# Altium PCB DVT-Notch-Filter.PcbDoc
Units mm, origin at the board's own origin, x right, y up, seen from the top; angles counter-clockwise.
Board outline 60 x 45 mm, 2 copper layers (Top Layer, Bottom Layer); 26 components, 11 nets, 60 pads, 2 vias.
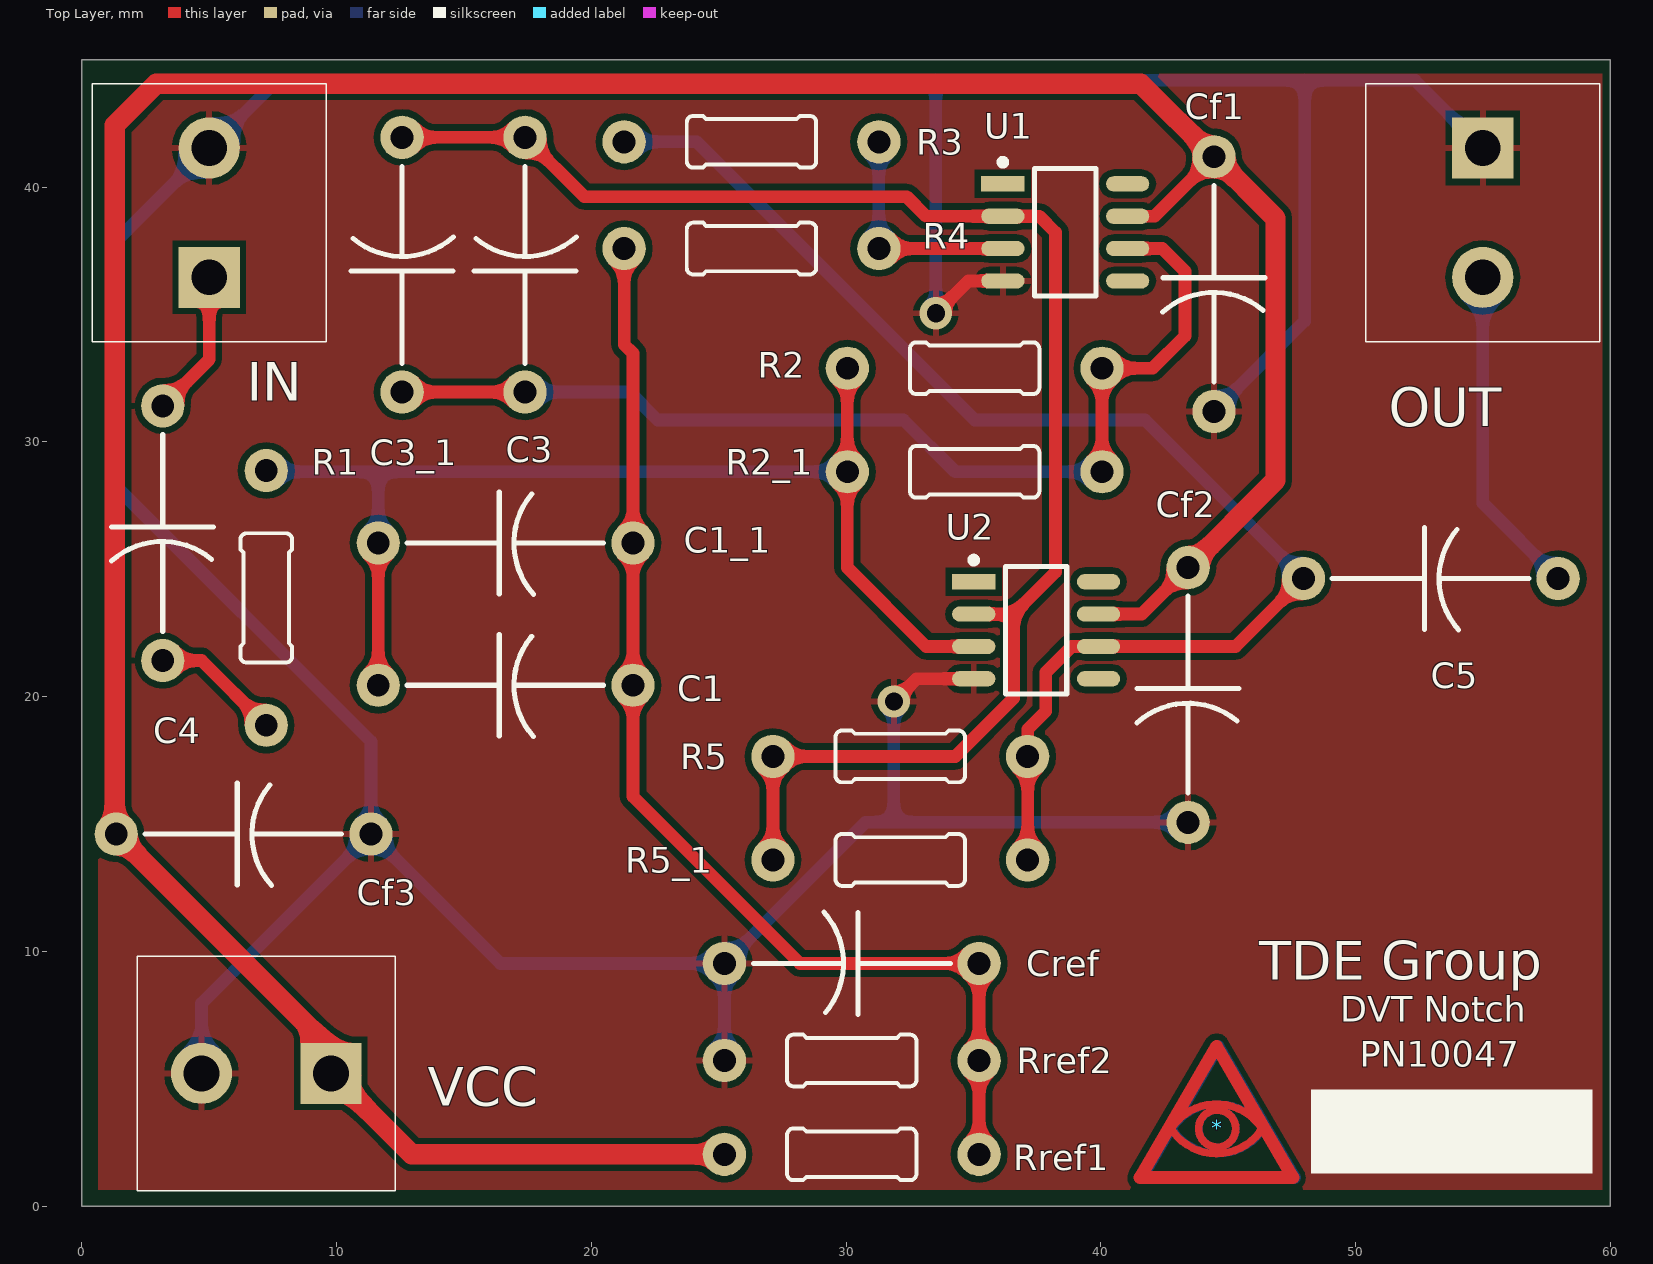
[diagram p0: Top Layer view]
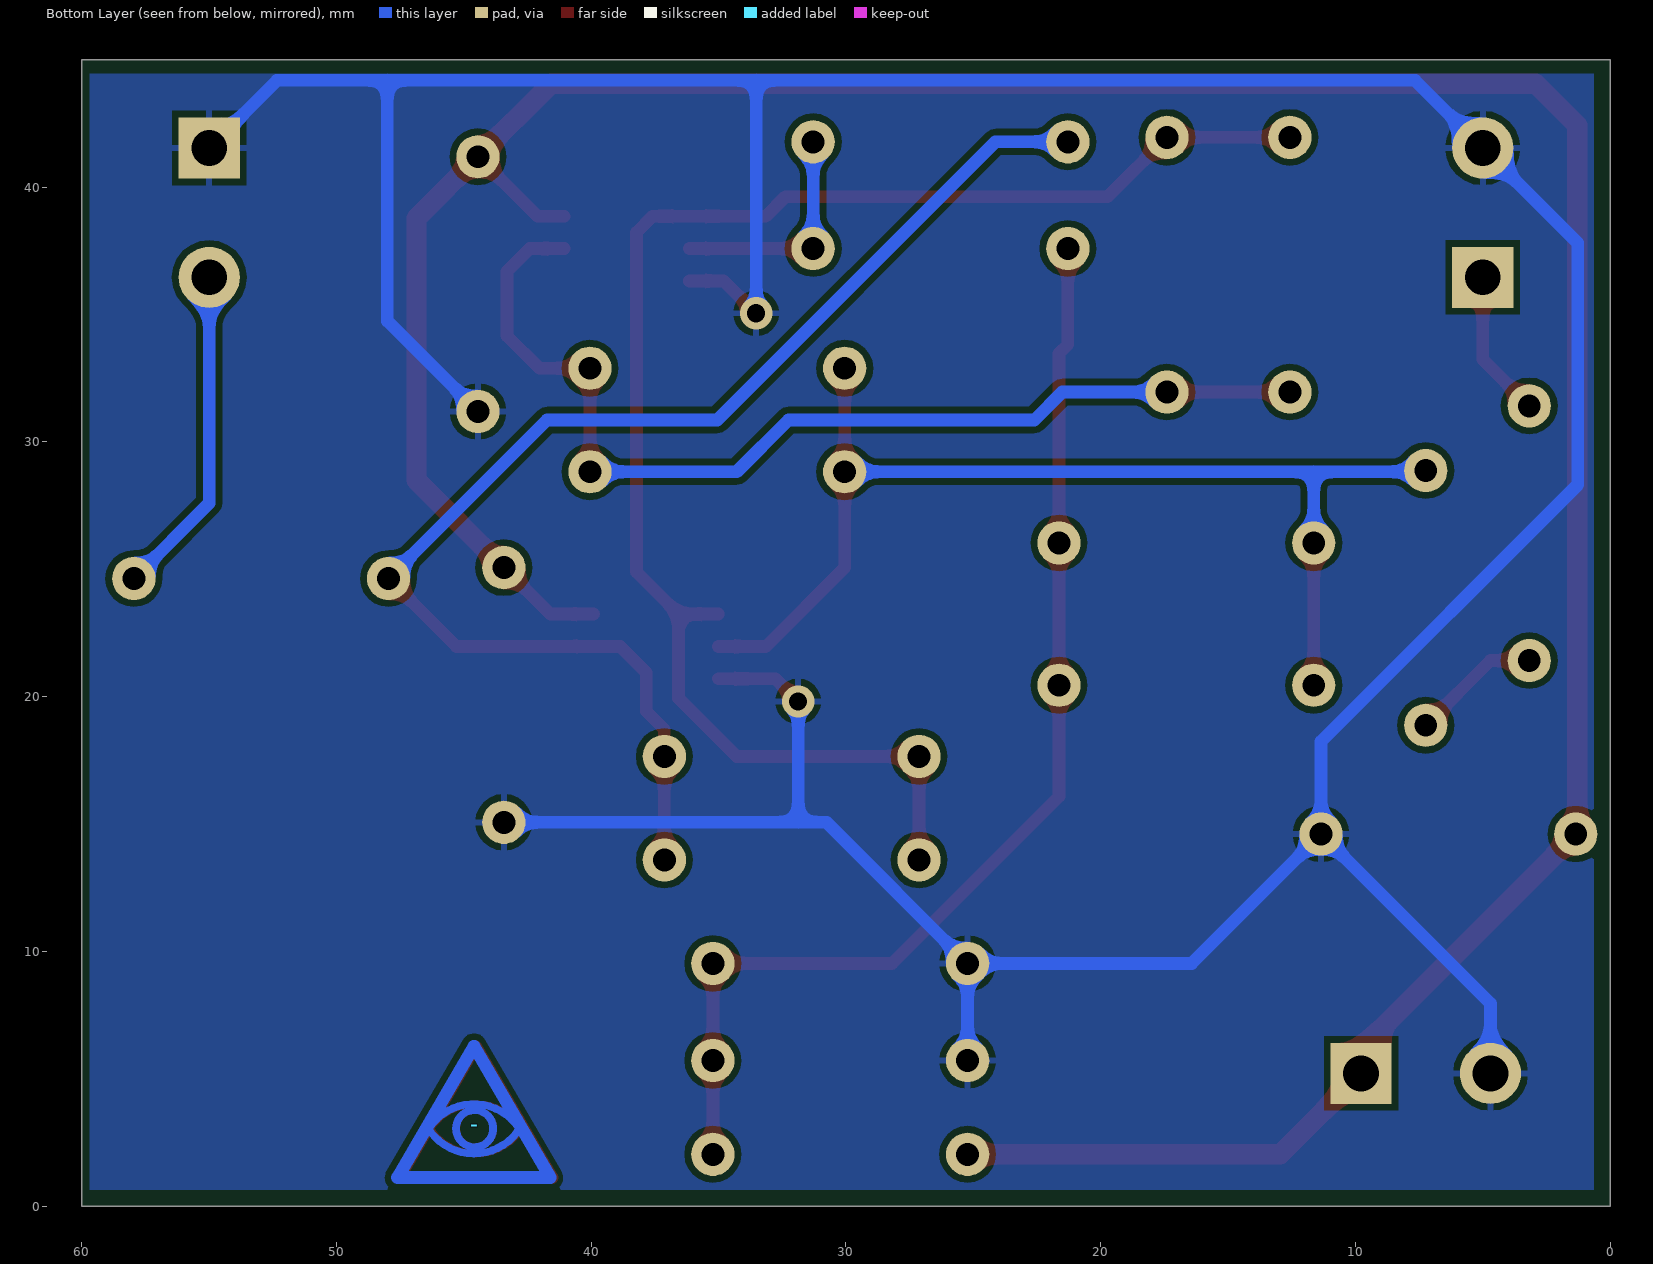
[diagram p1: Bottom Layer view, seen from below]

## Layer stack, top to bottom
Top Solder: solder mask 0.0102, Solder Resist, Dk 3.5
Top Layer: signal copper 0.0356
Dielectric 1: dielectric 0.32, FR-4, Dk 4.8
Bottom Layer: signal copper 0.0356
Bottom Solder: solder mask 0.0102, Solder Resist, Dk 3.5

## Board outline
0,0 60,0 60,45 0,45

## Design rules (kind name [scope] priority, off if disabled: settings)
Clearance Polygons [InPolygon] p1: gap=0.254
Clearance [All] p2: gap=0.15
MinimumSolderMaskSliver [All] p1: minsoldermaskwidth=0.158
PolygonConnect [All] p1: connectstyle=Relief reliefconductorwidth=0.254 reliefentries=4 polygonreliefangle="90 Angle" airgapwidth=0.254
RoomDefinition DVT-Notch-Filter [InComponentClass('DVT-Notch-Filter')] p1: confinementstyle=ConfineIn formatcopy=TRUE lockcomponents=FALSE outline -5.842,-5.08 68.199,-5.08 68.199,49.657 -5.842,49.657
RoutingVias [All] p1: holewidth=0.711 width=1.27 viastyle="Through Hole" minholewidth=0 minwidth=0 maxholewidth=0.711 maxwidth=1.27
SilkToSilkClearance [All] p1: silktosilkclearance=0.15
SilkToSolderMaskClearance [IsPad] p1: minsilkscreentomaskgap=0.1 clearancetoexposedcopper=TRUE
SolderMaskExpansion [All] p1: expansion=0.102
Width [All] p1: maxlimit=4 minlimit=0.254 preferedwidth=0.5
27 further rules are at their usual default settings.

## Components (designator, comment, footprint, x,y, rotation, side; value= is the part's Value field where it differs from the comment)
* "Eye" Eye 44.577,3.048 r0 top
- "Eye" Eye 44.577,3.048 r180 bottom
C1 "Capacitor-Dummy-THT" Dummy-10mm 16.637,20.447 r0 top
C1_1 "Capacitor-Dummy-THT" Dummy-10mm 16.637,26.035 r0 top
C3 "Capacitor-Dummy-THT" Dummy-10mm 17.399,36.957 r90 top
C3_1 "Capacitor-Dummy-THT" Dummy-10mm 12.573,36.957 r90 top
C4 "Capacitor-Dummy-THT" Dummy-10mm 3.175,26.416 r270 top
C5 "Capacitor-Dummy-THT" Dummy-10mm 52.959,24.638 r0 top
Cf1 "Capacitor-Dummy-THT" Dummy-10mm 44.45,36.195 r270 top
Cf2 "Capacitor-Dummy-THT" Dummy-10mm 43.434,20.066 r270 top
Cf3 "Capacitor-Dummy-THT" Dummy-10mm 6.35,14.605 r0 top
Cref "Capacitor-Dummy-THT" Dummy-10mm 30.226,9.525 r180 top
IN "PHOENIX_1715721" Phoenix-2-5_08 5,39 r90 top
OUT "PHOENIX_1715721" Phoenix-2-5_08 55,39 r270 top
R1 "Resistor-Dummy-THT" Dummy-10mm 7.239,23.876 r270 top
R2 "Resistor-Dummy-THT" Dummy-10mm 35.052,32.893 r180 top
R2_1 "Resistor-Dummy-THT" Dummy-10mm 35.052,28.829 r180 top
R3 "Resistor-Dummy-THT" Dummy-10mm 26.289,41.783 r0 top
R4 "Resistor-Dummy-THT" Dummy-10mm 26.289,37.592 r0 top
R5 "Resistor-Dummy-THT" Dummy-10mm 32.131,17.653 r0 top
R5_1 "Resistor-Dummy-THT" Dummy-10mm 32.131,13.589 r0 top
Rref1 "Resistor-Dummy-THT" Dummy-10mm 30.226,2.032 r180 top
Rref2 "Resistor-Dummy-THT" Dummy-10mm 30.226,5.715 r0 top
U1 "OPA820ID" SOP8_L 38.608,38.227 r0 top
U2 "OPA820ID" SOP8_L 37.465,22.606 r0 top
VCC "PHOENIX_1715721" Phoenix-2-5_08 7.239,5.207 r180 top

## Footprints (in the part's own frame and the unit in brackets; to place one, negate y for a bottom-side part, rotate by r counter-clockwise, add the part's x,y. Pads: shape width x height; smd on the part's side, far side on the other; paste and mask are expansions set on the pad)
Dummy-10mm [mm] "Dummy-10mm"
  round 1.7 hole 0.9: 1(-5,0) 2(5,0)
  silkscreen extent -3.88,-2.01 3.85,2, body extent -2.39,-0.88 2.41,0.88, height 1.87
Eye [mm]
  Top Layer circle w0.3: c-0.005,-0.005 r0.728
  Top Layer lines w0.3: -1.862,0.058 ccw(c-0.03,1.138) 1.792,0.042 ; -1.796,0.014 cw(c-0.03,-1.17) 1.74,0.007
  Top Layer lines w0.5: -3.03,-1.93 -0.025,3.225 2.97,-1.93 -3.03,-1.93
Phoenix-2-5_08 [mm] "Phoenix, 1715721"
  rect 2.4x2.4 hole 1.4: 1(-2.54,0)
  round 2.4 hole 1.4: 2(2.54,0)
  silkscreen extent -5.06,-4.6 5.06,4.6, body extent -5.05,-5.19 5.85,4.61, height 14.2
SOP8_L [mm] "SOIC, 8-Leads, Body 4.9x3.9mm, Pitch 1.27mm, IPC High Density"
  rect 1.7x0.6 smd: 1(-2.45,1.905)
  oval 1.7x0.6 smd: 2(-2.45,0.635) 3(-2.45,-0.635) 4(-2.45,-1.905) 5(2.45,-1.905) 6(2.45,-0.635) 7(2.45,0.635) 8(2.45,1.905)
  silkscreen extent -2.57,-2.5 1.2,2.88, body extent -3,-2.54 3,2.54, height 1.7

## Part data
IN OUT VCC: library part 2Pol_1715721, "Phoenix, 2 pol, 5.08mm, 22A, 715721"
U1 U2: "High speed OP, 260MHz"

## Via types
v1: diameter 1.27, hole 0.711, Top Layer to Bottom Layer, 2 vias

## Nets (pads, with @x,y where several pads share a name; then routed paths per layer and width w, separated by ;. In a path a pad name is that pad's centre, name@x,y a point inside that pad or via, vN(x,y) a via of type N, cw(c..) or ccw(c..) an arc to the next point about the centre after c; other vN are vias at no path point)
GND: Cf1.2 Cf2.2 Cf3.2 Cref.2 IN.2 OUT.1 Rref2.1 U1.4 U2.4 VCC.2 | length 172.3
  Top Layer w0.5: v1(31.877,19.812) 32.766,20.701 U2.4 ; v1(33.528,35.052) 34.798,36.322 U1.4
  Bottom Layer w0.5: VCC.2 4.699,7.954 Cf3.2 ; Rref2.1 Cref.2 ; v1(31.877,19.812) 31.877,15.066 ; v1(33.528,35.052) 33.528,44.196 ; Cf2.2 31.877,15.066 ; Cf1.2 48.006,34.751 48.006,44.196 ; OUT.1 52.344,44.196 48.006,44.196 ; Cf3.2 11.35,18.241 1.27,28.321 1.27,37.81 IN.2 7.656,44.196 33.528,44.196 ; Cf3.2 16.43,9.525 Cref.2 ; Cref.2 30.767,15.066 31.877,15.066 ; 33.528,44.196 48.006,44.196
NetC1_1: C1.1 C1_1.1 R1.1 R2.2 R2_1.2 U2.3 | length 45.3
  Top Layer w0.5: C1.1 C1_1.1 ; R2.2 R2_1.2 30.052,25.066 33.147,21.971 U2.3
  Bottom Layer w0.5: R1.1@7.239,28.829 R2_1.2 ; C1_1.1 11.637,28.829
NetC3_1: C3.1 C3_1.1 R2.1 R2_1.1 U1.6 | length 41.8
  Top Layer w0.5: C3_1.1 C3.1 ; R2_1.1 R2.1 42.037,32.893 43.307,34.163 43.307,36.703 42.418,37.592 U1.6
  Bottom Layer w0.5: C3.1 21.51,31.957 22.606,30.861 32.258,30.861 34.29,28.829 R2_1.1
NetC3_2: C3.2 C3_1.2 R5.1 R5_1.1 U1.2 U2.2 | length 62.2
  Top Layer w0.5: C3_1.2 C3.2 19.732,39.624 32.385,39.624 33.147,38.862 U1.2 37.592,38.862 38.227,38.227 38.227,24.892 36.576,23.241 ; R5_1.1 R5.1 34.29,17.653 36.576,19.939 36.576,23.241 ; U2.2 36.576,23.241
NetC4_1: C4.1 IN.1 | length 5.8
  Top Layer w0.5: C4.1 5,33.241 IN.1
NetC4_2: C4.2 R1.2 | length 5.1
  Top Layer w0.5: C4.2 4.699,21.416 R1.2
NetC5_1: C5.1 R3.1 R5.2 R5_1.2 U2.6 | length 53.1
  Top Layer w0.5: R5_1.2 R5.2 37.131,18.716 37.846,19.431 37.846,20.955 38.862,21.971 U2.6 45.292,21.971 C5.1
  Bottom Layer w0.5: R3.1 24.13,41.783 35.052,30.861 41.736,30.861 C5.1
NetC5_2: C5.2 OUT.2 | length 13
  Bottom Layer w0.5: OUT.2 55,27.597 C5.2
NetR3_2: R3.2 R4.2 U1.3 | length 9.1
  Top Layer w0.5: R4.2 U1.3
  Bottom Layer w0.5: R4.2 R3.2
VCC: Cf1.1 Cf2.1 Cf3.1 Rref1.2 U1.7 U2.7 VCC.1 | length 129.7
  Top Layer w0.5: U2.7 41.609,23.241 Cf2.1 ; U1.7 42.117,38.862 Cf1.1
  Top Layer w0.8: Cf3.1@1.29,14.605 1.29,42.438 2.921,44.069 41.576,44.069 Cf1.1 46.863,38.782 46.863,28.495 Cf2.1 ; Cf3.1 9.779,6.176 VCC.1 12.954,2.032 Rref1.2
VREF: C1.2 C1_1.2 Cref.1 R4.1 Rref1.1 Rref2.2 | length 45.5
  Top Layer w0.5: R4.1 21.289,33.829 21.637,33.481 C1_1.2 C1.2 21.637,16.082 28.194,9.525 Cref.1 Rref2.2 Rref1.1
pads on no net: U1.1 U1.5 U1.8 U2.1 U2.5 U2.8

## Polygon pours and split planes (outlines as drawn)
GND on Bottom Layer "GND" (solid, pour order 0): 0.635,0.635 59.69,0.635 59.69,44.45 0.635,44.45
GND on Top Layer "GND-1" (solid, pour order 2): 0.635,0.635 59.69,0.635 59.69,44.45 0.635,44.45

## Silkscreen, mask and mechanical layers (free items; w line width, h text height)
Top Overlay:
  rectangle: 48.26,1.27 59.309,4.572
  text "TDE Group" at 46.228,8.89 h1.5
  text "DVT Notch" at 49.403,7.239 h1
  text "PN10047" at 50.165,5.461 h1
Outline:
  the board outline again, w0.5

## Dimensions
60,45 to 60,0 on Mechanical 16
0,0 to 60,0 on Mechanical 16